# EAGLE board FHUYH4WICG2AL3Y (EAGLE 7.2.0)
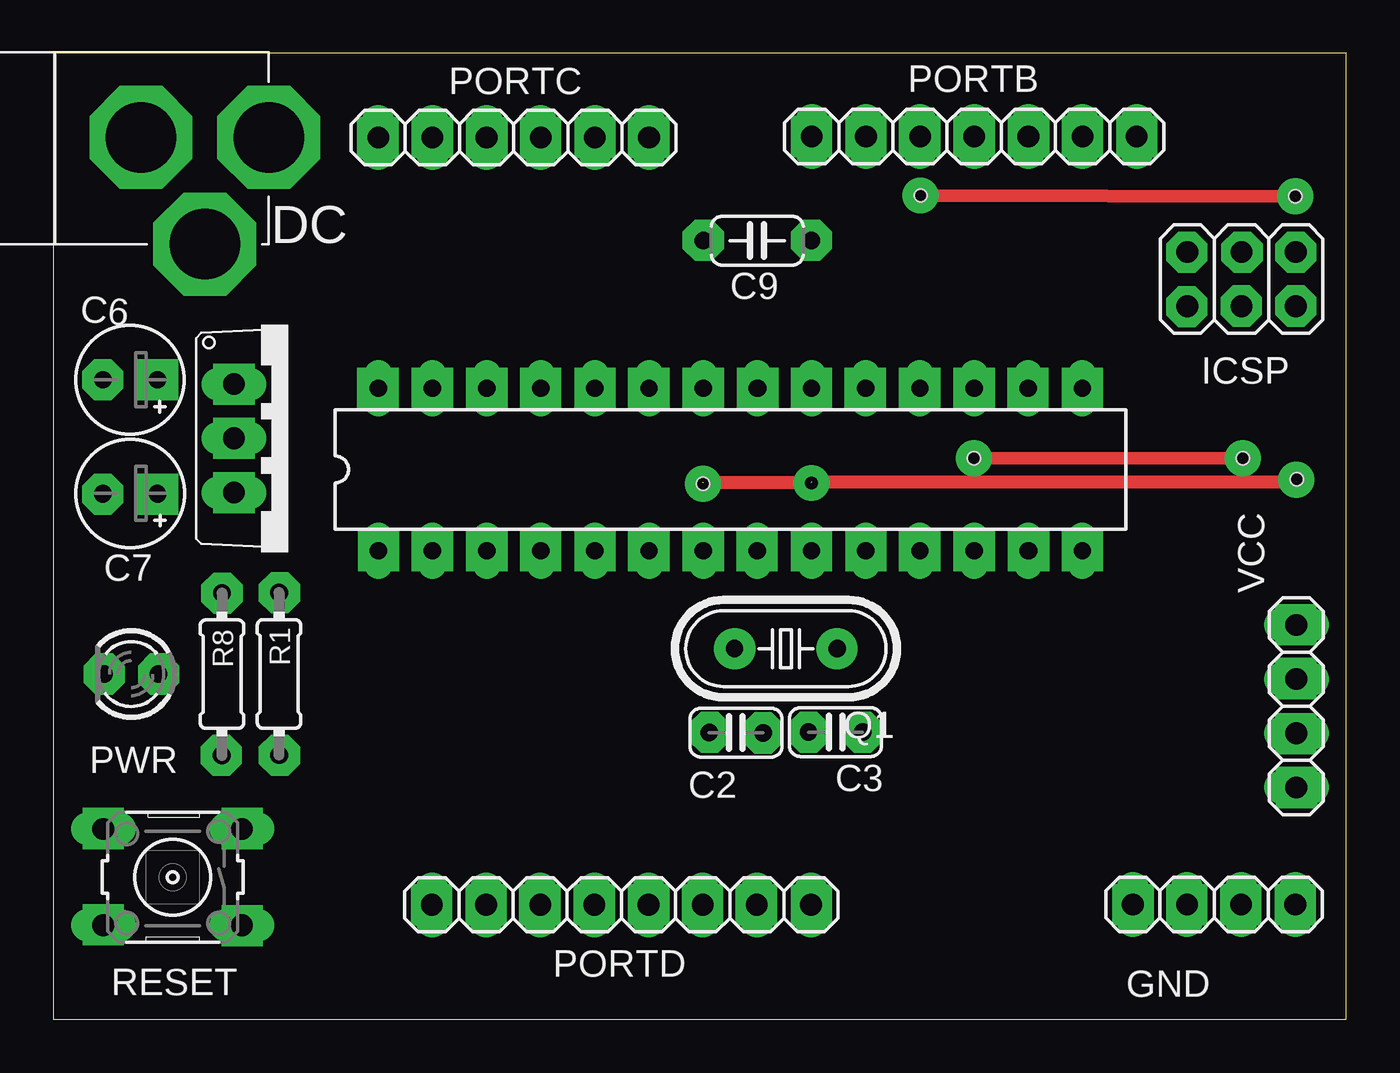
[diagram p0: board, top side]
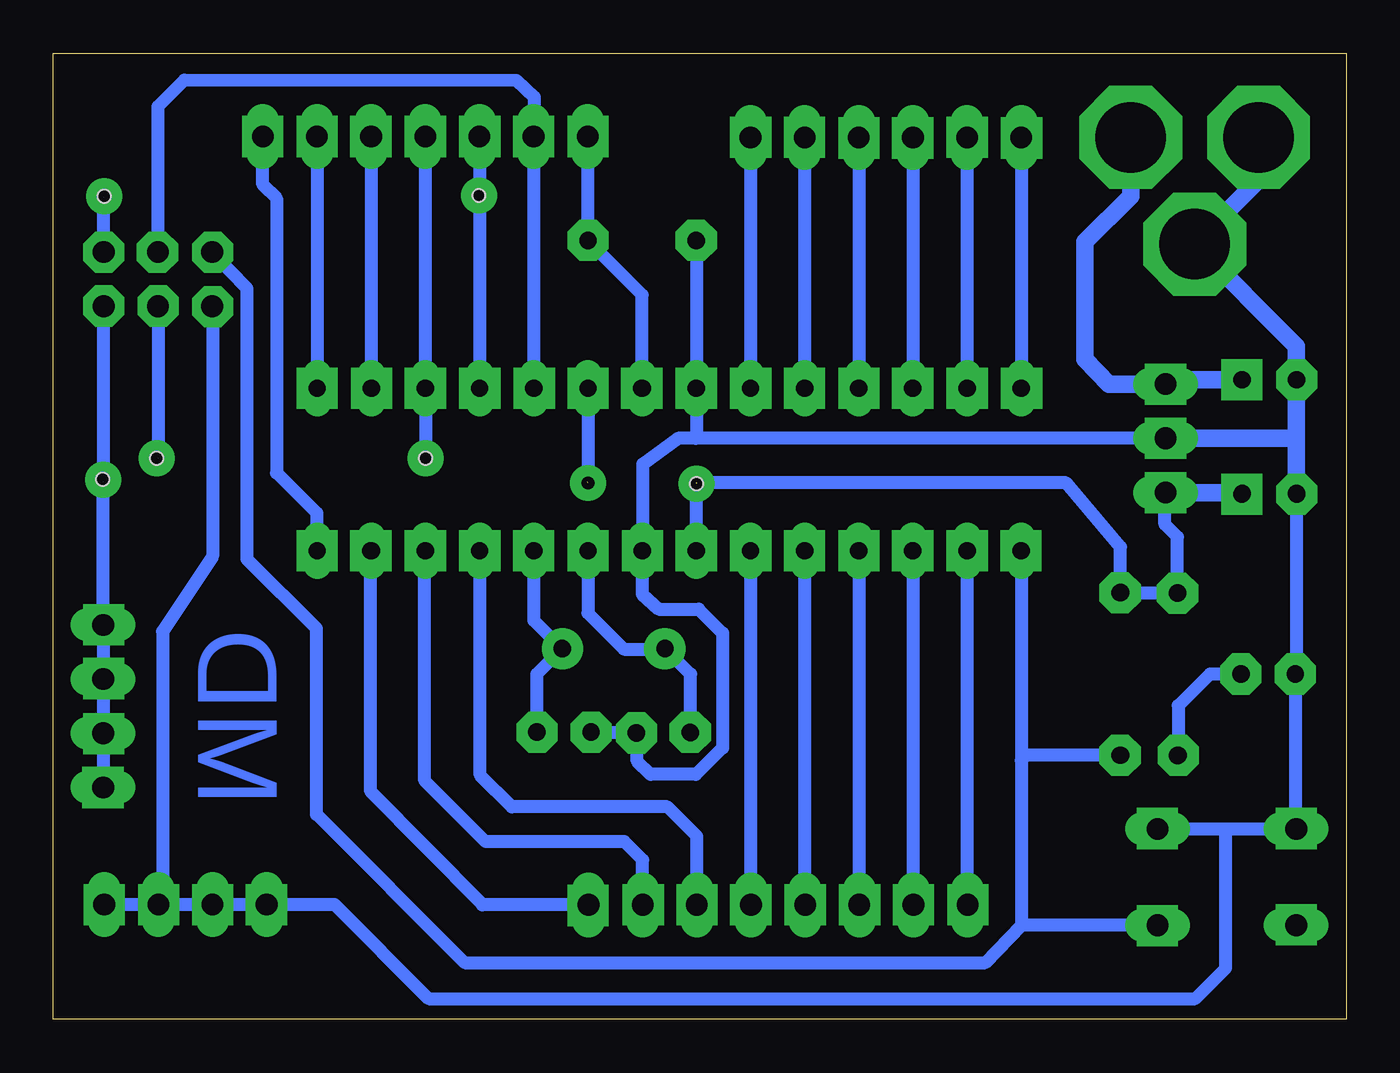
[diagram p1: board, bottom side, seen from below]

Size 60.63 x 45.3 mm. Coordinates in mm from the lower left corner, seen from the top.
Outline: 0,0 60.63,0 60.63,45.3 0,45.3 0,0
Copper layers (1*16): Top 0.035mm / dielectric 1.5mm / Bottom 0.035mm
Design rules "default *": minimum track width 10mil, minimum drill 24mil, track to track 15mil, track to pad 15mil, pad to pad 8mil, via to via 8mil, smd to smd 8mil, copper to edge 40mil, drill to drill 8mil, minimum pad ring 10mil, minimum via ring 8mil, stop-mask expansion 4mil, vias tented up to drill 0mil, thermal gap 10mil
Net classes: 0 default: width 0.203 mm, clearance 0.203 mm; 1 power: width 0.6 mm, clearance 0.305 mm; 2 finepitch: width 0.203 mm, clearance 0.203 mm
Holes 0.6 mm at 58.25,38.59 40.68,38.63 55.78,26.31 58.32,25.33 30.48,25.12 43.18,26.32

## Footprints (pad centres in the part's own frame; a part is rotated, then mirrored left to right if it is on the bottom)
DIL28-3 = drill 0.813 long: 1 -16.51,-3.81; 2 -13.97,-3.81; 3 -11.43,-3.81; 4 -8.89,-3.81; 5 -6.35,-3.81; 6 -3.81,-3.81; 7 -1.27,-3.81; 8 1.27,-3.81; 9 3.81,-3.81; 10 6.35,-3.81; 11 8.89,-3.81; 12 11.43,-3.81; 13 13.97,-3.81; 14 16.51,-3.81; 15 16.51,3.81; 16 13.97,3.81; 17 11.43,3.81; 18 8.89,3.81; 19 6.35,3.81; 20 3.81,3.81; 21 1.27,3.81; 22 -1.27,3.81; 23 -3.81,3.81; 24 -6.35,3.81; 25 -8.89,3.81; 26 -11.43,3.81; 27 -13.97,3.81; 28 -16.51,3.81
C025-024X044 = drill 0.813 octagon: 1 -1.27,0; 2 1.27,0
E2,5-5 = drill 0.813 pad 1.6: + -1.27,0 | drill 0.813 pad 1.6 octagon: - 1.27,0
C050-024X044 = drill 0.813 octagon: 1 -2.54,0; 2 2.54,0
DC-21MM = drill 3.302 pad 4.826 octagon: 1 -5.08,-3.353; 2 -0.076,-6.35; 3 -0.076,-0.356
1X04 = drill 1.016 long: 1 -3.81,0; 2 -1.27,0; 3 1.27,0; 4 3.81,0
2X03 = drill 1.016 octagon: 1 -2.54,-1.27; 2 -2.54,1.27; 3 0,-1.27; 4 0,1.27; 5 2.54,-1.27; 6 2.54,1.27
1X07 = drill 1.016 long: 1 -7.62,0; 2 -5.08,0; 3 -2.54,0; 4 0,0; 5 2.54,0; 6 5.08,0; 7 7.62,0
1X06 = drill 1.016 long: 1 -6.35,0; 2 -3.81,0; 3 -1.27,0; 4 1.27,0; 5 3.81,0; 6 6.35,0
1X08 = drill 1.016 long: 1 -8.89,0; 2 -6.35,0; 3 -3.81,0; 4 -1.27,0; 5 1.27,0; 6 3.81,0; 7 6.35,0; 8 8.89,0
LED3MM = drill 0.813 octagon: A -1.27,0; K 1.27,0
HC49U-V = drill 0.813: 1 -2.413,0; 2 2.413,0
0204/7 = drill 0.813 octagon: 1 -3.81,0; 2 3.81,0
TO220V = drill 1.016 long: 1 -2.54,-2.54; 2 0,-2.54; 3 2.54,-2.54
B3F-10XX = drill 1.016 long: 1 -3.251,2.261; 2 3.251,2.261; 3 -3.251,-2.261; 4 3.251,-2.261

## Placement (x,y rotation side)
BVALUE  ATMEGA168  [DIL28-3]  31.75,25.79 0 top
C2  22pf  [C025-024X044]  32.02,13.45 180 top
C3  22pf  [C025-024X044]  36.69,13.47 0 top
C6  47u  [E2,5-5]  3.6,29.99 180 top
C7  47u  [E2,5-5]  3.6,24.66 180 top
C9  100n  [C050-024X044]  33.02,36.51 180 top
DC  9V in  [DC-21MM]  3.75,41.43 90 top
GND  [1X04]  54.44,5.39 180 top
ICSP  ICSP  [2X03]  55.73,34.71 180 top
PORTB  [1X07]  43.19,41.4 0 top
PORTC  [1X06]  21.59,41.35 180 top
PORTD  [1X08]  26.64,5.38 0 top
PWR  [LED3MM]  3.65,16.2 180 top
Q1  20Mhz  [HC49U-V]  34.36,17.38 180 top
R1  10k  [0204/7]  10.59,16.2 90 top
R8  330  [0204/7]  7.91,16.19 270 top
REG  7805  [TO220V]  11.01,27.24 270 top
RESET  [B3F-10XX]  5.59,6.67 180 top
VCC  [1X04]  58.3,14.69 90 top

## Library data of the parts
BVALUE = my-library
C2 C3 C6 C7 C9 R1 R8 = rcl
DC = powersupply
GND ICSP PORTB PORTC PORTD VCC = pinhead
PWR = led
Q1 = crystal
REG = linear
RESET = switch-omron

## Nets
+5V [power]: BVALUE.7 C7.+ ICSP.2 R1.2 R8.1 REG.3 VCC.1 VCC.2 VCC.3 VCC.4
AREF: BVALUE.21 C9.1
GND [power]: GND.1 GND.2 GND.3 GND.4 RESET.3 RESET.4
N$2: BVALUE.15 PORTB.6
N$3: PWR.A R8.2
N$6: BVALUE.9 C2.2 Q1.2
N$10: BVALUE.4 PORTD.3
N$11: BVALUE.5 PORTD.4
N$12: BVALUE.6 PORTD.5
N$13: BVALUE.11 PORTD.6
N$14: BVALUE.12 PORTD.7
N$15: BVALUE.13 PORTD.8
N$16: BVALUE.23 PORTC.1
N$17: BVALUE.24 PORTC.2
N$18: BVALUE.25 PORTC.3
N$19: BVALUE.26 PORTC.4
N$20: BVALUE.27 PORTC.5
N$21: BVALUE.28 PORTC.6
N$22: BVALUE.3 PORTD.2
N$23: BVALUE.16 PORTB.5
N$26: ICSP.1 PORTB.3
N$28: PORTB.7
N$31: BVALUE.10 C3.2 Q1.1
N$43: BVALUE.17 ICSP.4 PORTB.4
N$44: BVALUE.2 PORTD.1
RESET: BVALUE.1 ICSP.5 R1.1 RESET.1
S$1 [power]: BVALUE.8 BVALUE.22 C2.1 C6.- C7.- C9.2 DC.1 DC.3 PWR.K REG.2
S$10: PORTB.1
SCK: BVALUE.19 ICSP.3 PORTB.2
VIN [power]: C6.+ DC.2 REG.1

## Tracks (layer width: path | path; a pad name or v marks a point on that pad's centre or on a via)
+5V  (via drill 0.6 pad 1.68)  (3 unrouted)
  Top 0.61: v35.55,25.15 30.51,25.15 30.5,25.16 | 35.58,25.22 58.3,25.22
  Bottom 0.61: REG.3 8.5,24.68 8.5,23.21 7.91,22.62 R8.1 R1.2 10.59,22.15 13.13,25.15 30.45,25.15 | 35.56,25.09 v35.55,25.15 35.55,29.59 | BVALUE.7 30.48,24.95 30.48,25.15 30.45,25.15 | 30.45,25.15 30.44,25.16 | VCC.1 VCC.2 VCC.3 VCC.4 58.3,25.22 58.27,25.31 ICSP.2
  Bottom 0.813: REG.3 4.92,24.7 C7.+
AREF
  Bottom 0.61: BVALUE.21 33.02,33.98 C9.1
GND
  Bottom 0.61: GND.1 GND.2 | GND.2 53.37,5.39 | 53.37,5.39 GND.3 GND.4 47.45,5.39 43.03,0.97 7.08,0.97 5.66,2.4 5.66,8.87 5.72,8.94 | 53.19,5.41 53.37,5.39 | RESET.3 5.72,8.94 | 5.72,8.94 RESET.4 | 53.17,33.42 53.17,21.71 55.51,18.2 55.51,5.59 GND.2
N$1  (via drill 0.6 pad 1.68)
  other vias: 40.68,38.63
N$2
  Bottom 0.61: PORTB.6 48.27,28.89 BVALUE.15
N$3  (via drill 0.8 pad 1.93)
  Bottom 0.61: PWR.A v4.93,16.2 6.39,16.2 7.88,14.71 7.88,12.42 R8.2
N$4  (via drill 0.6 pad 1.68)
  other vias: 58.25,38.59
N$5  (via drill 0.6 pad 1.68)
  other vias: 58.3,25.3
N$6  (via drill 0.8 pad 1.93)
  Bottom 0.61: v35.56,21.97 35.56,19.04 33.88,17.36 31.97,17.36 Q1.2 30.75,16.19 C2.2
N$9  (via drill 0.6 pad 1.68)
  other vias: 55.78,26.31
N$10
  Bottom 0.61: BVALUE.4 22.86,5.4 PORTD.3
N$11
  Bottom 0.61: BVALUE.5 25.4,5.4 PORTD.4
N$12
  Bottom 0.61: BVALUE.6 27.94,5.4 PORTD.5
N$13
  Bottom 0.61: PORTD.6 30.45,8.58 31.84,9.97 39.12,9.97 40.62,11.46 40.62,21.23 BVALUE.11
N$14
  Bottom 0.61: PORTD.7 32.99,7.48 33.85,8.34 40.35,8.34 43.22,11.2 43.22,21.22 BVALUE.12
N$15
  Bottom 0.61: PORTD.8 40.51,5.38 45.75,10.68 45.75,21.23 BVALUE.13
N$16
  Bottom 0.61: PORTC.1 BVALUE.23
N$17
  Bottom 0.61: PORTC.2 BVALUE.24
N$18
  Bottom 0.61: PORTC.3 BVALUE.25
N$19
  Bottom 0.61: PORTC.4 BVALUE.26
N$20  (via drill 0.8 pad 1.93)
  Bottom 0.61: PORTC.5 v17.78,29.6 BVALUE.27
N$21
  Bottom 0.61: PORTC.6 BVALUE.28
N$22  (via drill 0.8 pad 1.93)
  Bottom 0.61: BVALUE.3 20.32,5.4 PORTD.2
  other vias: 20.3,5.38
N$23
  Bottom 0.61: PORTB.5 45.73,28.89 BVALUE.16
N$24  (via drill 0.6 pad 1.68)
  other vias: 30.47,25.12
N$26  (via drill 0.6 pad 1.68)  (1 unrouted)
  Top 0.61: v40.65,38.63 58.22,38.59 58.27,38.54
  Bottom 0.61: PORTB.3 v40.65,38.63 40.65,28.89 | ICSP.1 58.27,38.54 58.32,38.59
N$28
  Bottom 0.61: 48.28,21.29 48.28,23.74 50.17,25.63 50.17,38.5 50.81,39.14 PORTB.7
N$31
  Bottom 0.61: BVALUE.10 38.1,18.71 Q1.1 37.95,16.2 C3.2
N$43  (via drill 0.6 pad 1.68)  (1 unrouted)
  Top 0.61: v43.18,26.31 55.75,26.34 55.72,26.31
  Bottom 0.61: PORTB.4 43.19,29.61 BVALUE.17 v43.18,26.31 | ICSP.4 55.73,26.64 55.72,26.31
N$44  (via drill 0.8 pad 1.93)
  Bottom 0.61: v17.78,21.97 17.78,5.4 PORTD.1
RESET
  Bottom 0.61: BVALUE.1 15.24,12.15 | R1.1 15.06,12.39 15.24,12.15 | ICSP.5 51.55,34.27 51.55,21.58 48.3,18.33 48.3,9.62 41.34,2.67 16.93,2.67 15.24,4.41 | 15.24,12.15 15.24,4.41 | RESET.1 15.24,4.41
S$1
  Bottom 0.61: 35.39,13.45 C2.1 33.25,13.41 33.25,12.11 32.62,11.49 30.5,11.49 29.25,12.74 29.25,18.11 30.38,19.23 32.25,19.23 33.02,19.94 BVALUE.8 33,21.93 33,26.04 31.34,27.24 30.5,27.24 | C9.2 BVALUE.22 30.48,27.27 30.5,27.24 | REG.2 30.5,27.24 | 2.33,24.79 2.33,16.18 PWR.K 2.38,8.91
  Bottom 0.813: DC.3 4.11,39.35 DC.1 2.33,31.57 C6.- 2.33,27.21 | REG.2 2.37,27.24 2.33,27.21 | 2.33,27.21 2.33,24.79 C7.-
S$2  (via drill 0.8 pad 1.93)
  other vias: 15.22,41.33
S$3  (via drill 0.8 pad 1.93)
  other vias: 17.78,41.36
S$4  (via drill 0.8 pad 1.93)
  other vias: 20.34,41.33
S$5  (via drill 0.8 pad 1.93)
  other vias: 22.86,41.33
S$6  (via drill 0.8 pad 1.93)
  other vias: 25.41,41.36
S$7  (via drill 0.8 pad 1.93)
  other vias: 27.93,41.36
S$8  (via drill 0.8 pad 1.93)
  other vias: 35.56,41.4
S$9  (via drill 0.8 pad 1.93)
  other vias: 38.12,41.4
S$10
  Bottom 0.61: PORTB.1 35.57,36.53
S$11  (via drill 0.8 pad 1.93)
  other vias: 30.48,36.53
S$12  (via drill 0.8 pad 1.93)
  other vias: 40.63,41.4
S$13  (via drill 0.8 pad 1.93)
  other vias: 43.19,41.4
S$14  (via drill 0.8 pad 1.93)
  other vias: 45.74,41.4
S$15  (via drill 0.8 pad 1.93)
  other vias: 48.27,41.4
S$16  (via drill 0.8 pad 1.93)
  other vias: 50.82,41.4
S$17  (via drill 0.8 pad 1.93)
  other vias: 8.47,29.77
S$18  (via drill 0.8 pad 1.93)
  other vias: 8.47,27.25
S$19  (via drill 0.8 pad 1.93)
  other vias: 8.47,24.7
S$20  (via drill 0.8 pad 1.93)
  other vias: 4.9,29.98
S$21  (via drill 0.8 pad 1.93)
  other vias: 4.9,24.63
S$22  (via drill 0.8 pad 1.93)
  other vias: 2.31,29.98
S$23  (via drill 0.8 pad 1.93)
  other vias: 2.31,24.63
S$24  (via drill 0.8 pad 1.93)
  other vias: 35.56,36.53
S$25  (via drill 0.8 pad 1.93)
  other vias: 7.91,19.97
S$26  (via drill 0.8 pad 1.93)
  other vias: 10.61,20.01
S$27  (via drill 0.8 pad 1.93)
  other vias: 2.38,16.2
S$28  (via drill 0.8 pad 1.93)
  other vias: 7.88,12.38
S$29  (via drill 0.8 pad 1.93)
  other vias: 10.61,12.38
S$30  (via drill 0.8 pad 1.93)
  other vias: 2.35,8.95
S$31  (via drill 0.8 pad 1.93)
  other vias: 8.86,8.95
S$32  (via drill 0.8 pad 1.93)
  other vias: 2.35,4.43
S$33  (via drill 0.8 pad 1.93)
  other vias: 8.86,4.4
S$34  (via drill 0.8 pad 1.93)
  other vias: 17.75,5.38
S$35  (via drill 0.8 pad 1.93)
  other vias: 22.82,5.38
S$36  (via drill 0.8 pad 1.93)
  other vias: 25.38,5.38
S$37  (via drill 0.8 pad 1.93)
  other vias: 27.93,5.38
S$38  (via drill 0.8 pad 1.93)
  other vias: 30.45,5.38
S$39  (via drill 0.8 pad 1.93)
  other vias: 32.97,5.38
S$40  (via drill 0.8 pad 1.93)
  other vias: 35.56,5.34
S$41  (via drill 0.8 pad 1.93)
  other vias: 15.26,21.97
S$42  (via drill 0.8 pad 1.93)
  other vias: 20.34,21.97
S$43  (via drill 0.8 pad 1.93)
  other vias: 22.86,21.97
S$44  (via drill 0.8 pad 1.93)
  other vias: 25.41,21.97
S$45  (via drill 0.8 pad 1.93)
  other vias: 27.93,21.97
S$46  (via drill 0.8 pad 1.93)
  other vias: 30.48,21.97
S$47  (via drill 0.8 pad 1.93)
  other vias: 33.01,21.97
S$48  (via drill 0.8 pad 1.93)
  other vias: 38.12,21.97
S$49  (via drill 0.8 pad 1.93)
  other vias: 40.63,21.97
S$50  (via drill 0.8 pad 1.93)
  other vias: 43.19,21.97
S$51  (via drill 0.8 pad 1.93)
  other vias: 45.74,21.97
S$52  (via drill 0.8 pad 1.93)
  other vias: 48.27,21.97
S$53  (via drill 0.8 pad 1.93)
  other vias: 48.27,29.6
S$54  (via drill 0.8 pad 1.93)
  other vias: 45.71,29.6
S$55  (via drill 0.8 pad 1.93)
  other vias: 43.19,29.6
S$56  (via drill 0.8 pad 1.93)
  other vias: 40.63,29.6
S$57  (via drill 0.8 pad 1.93)
  other vias: 38.08,29.6
S$58  (via drill 0.8 pad 1.93)
  other vias: 35.56,29.6
S$59  (via drill 0.8 pad 1.93)
  other vias: 33.04,29.6
S$60  (via drill 0.8 pad 1.93)
  other vias: 30.48,29.6
S$61  (via drill 0.8 pad 1.93)
  other vias: 27.93,29.6
S$62  (via drill 0.8 pad 1.93)
  other vias: 25.41,29.6
S$63  (via drill 0.8 pad 1.93)
  other vias: 22.86,29.6
S$64  (via drill 0.8 pad 1.93)
  other vias: 20.34,29.6
S$65  (via drill 0.8 pad 1.93)
  other vias: 15.22,29.6
S$66  (via drill 0.8 pad 1.93)
  other vias: 50.65,5.38
S$67  (via drill 0.8 pad 1.93)
  other vias: 53.16,5.38
S$68  (via drill 0.8 pad 1.93)
  other vias: 55.69,5.38
S$69  (via drill 0.8 pad 1.93)
  other vias: 58.24,5.38
S$70  (via drill 0.8 pad 1.93)
  other vias: 58.31,10.88
S$71  (via drill 0.8 pad 1.93)
  other vias: 58.27,13.4
S$72  (via drill 0.8 pad 1.93)
  other vias: 58.27,15.99
S$73  (via drill 0.8 pad 1.93)
  other vias: 58.27,18.5
S$74  (via drill 0.8 pad 1.93)
  other vias: 30.77,13.47
S$75  (via drill 0.8 pad 1.93)
  other vias: 33.28,13.43
S$76  (via drill 0.8 pad 1.93)
  other vias: 35.42,13.47
S$77  (via drill 0.8 pad 1.93)
  other vias: 37.94,13.47
S$78  (via drill 0.8 pad 1.93)
  other vias: 31.95,17.38
S$79  (via drill 0.8 pad 1.93)
  other vias: 36.75,17.38
S$80  (via drill 0.8 pad 1.93)
  other vias: 53.16,35.97
S$81  (via drill 0.8 pad 1.93)
  other vias: 55.76,35.97
S$82  (via drill 0.8 pad 1.93)
  other vias: 58.27,35.97
S$83  (via drill 0.8 pad 1.93)
  other vias: 53.16,33.41
S$84  (via drill 0.8 pad 1.93)
  other vias: 55.72,33.45
S$85  (via drill 0.8 pad 1.93)
  other vias: 58.27,33.45
SCK
  Bottom 0.61: BVALUE.19 38.11,28.89 PORTB.2 38.08,41.43 38.08,43.25 38.92,44.03 54.48,44.05 55.73,42.81 ICSP.3
VIN
  Bottom 0.813: DC.2 10.11,38.61 12.25,36.46 12.25,30.96 11.12,29.77 8.59,29.77 REG.1 8.26,29.99 C6.+

## Text on the board
Bottom: MD